# EAGLE board Teensy_Board (EAGLE 7.1.0)
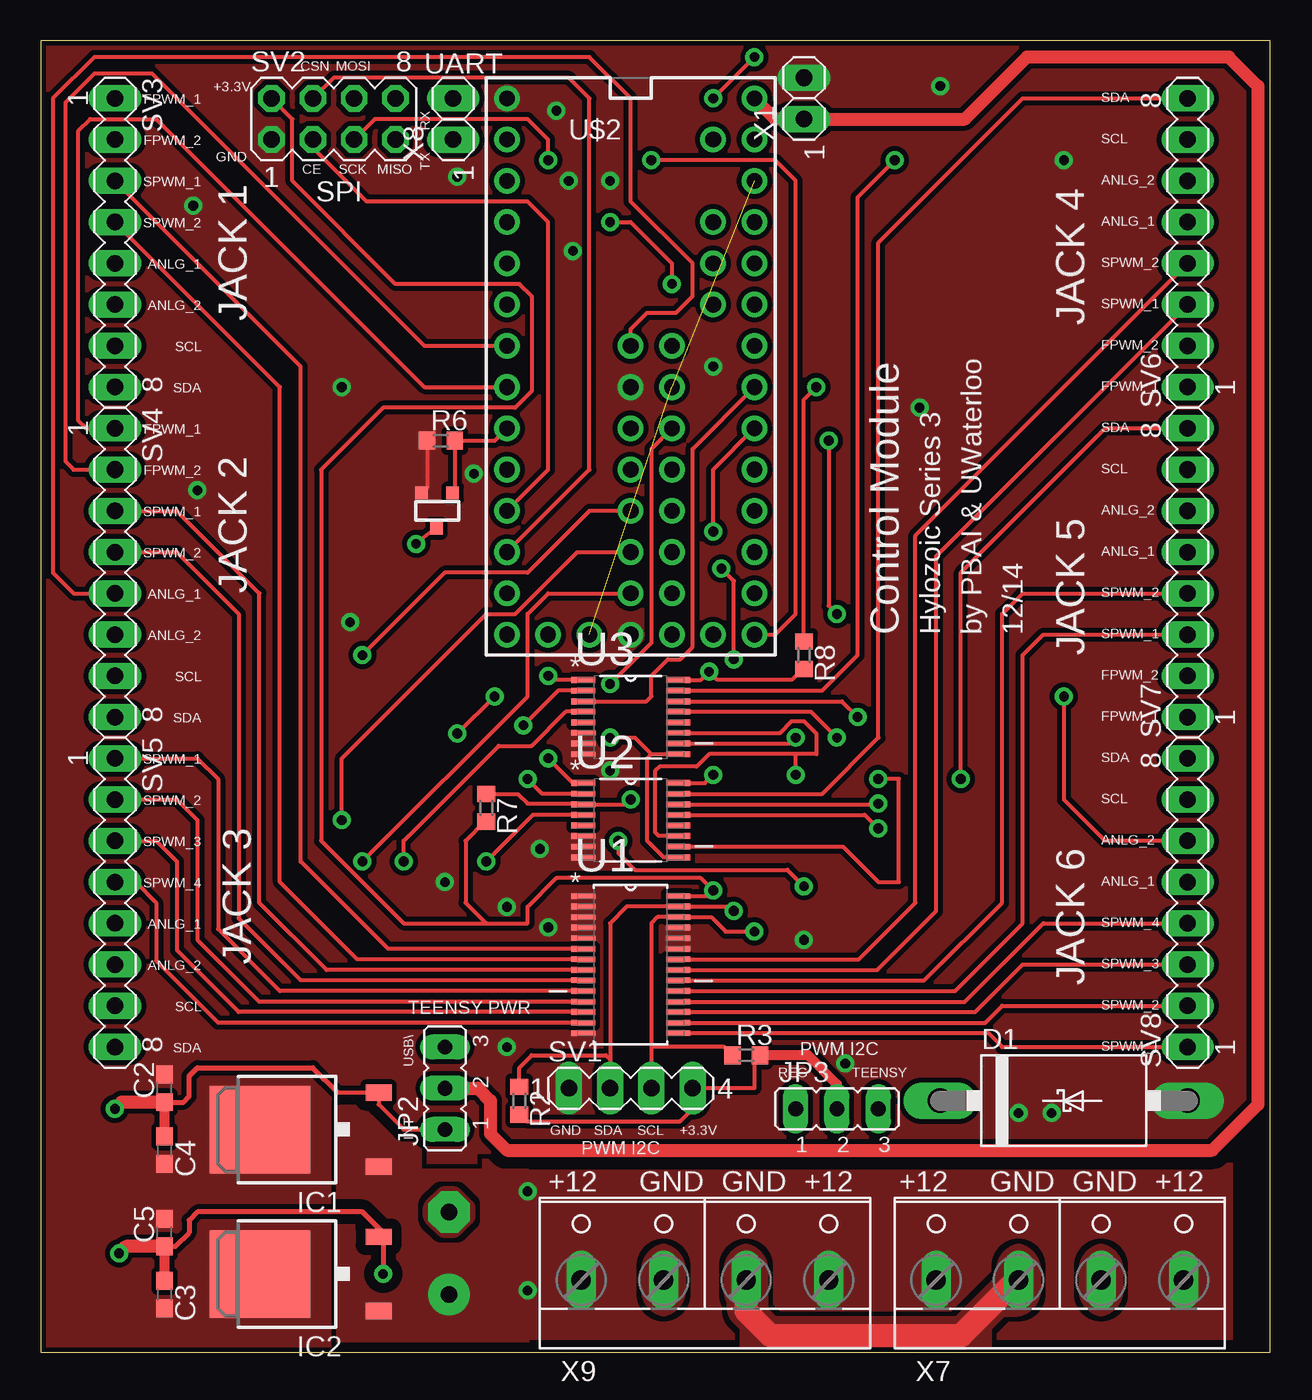
[diagram p0: board, top side]
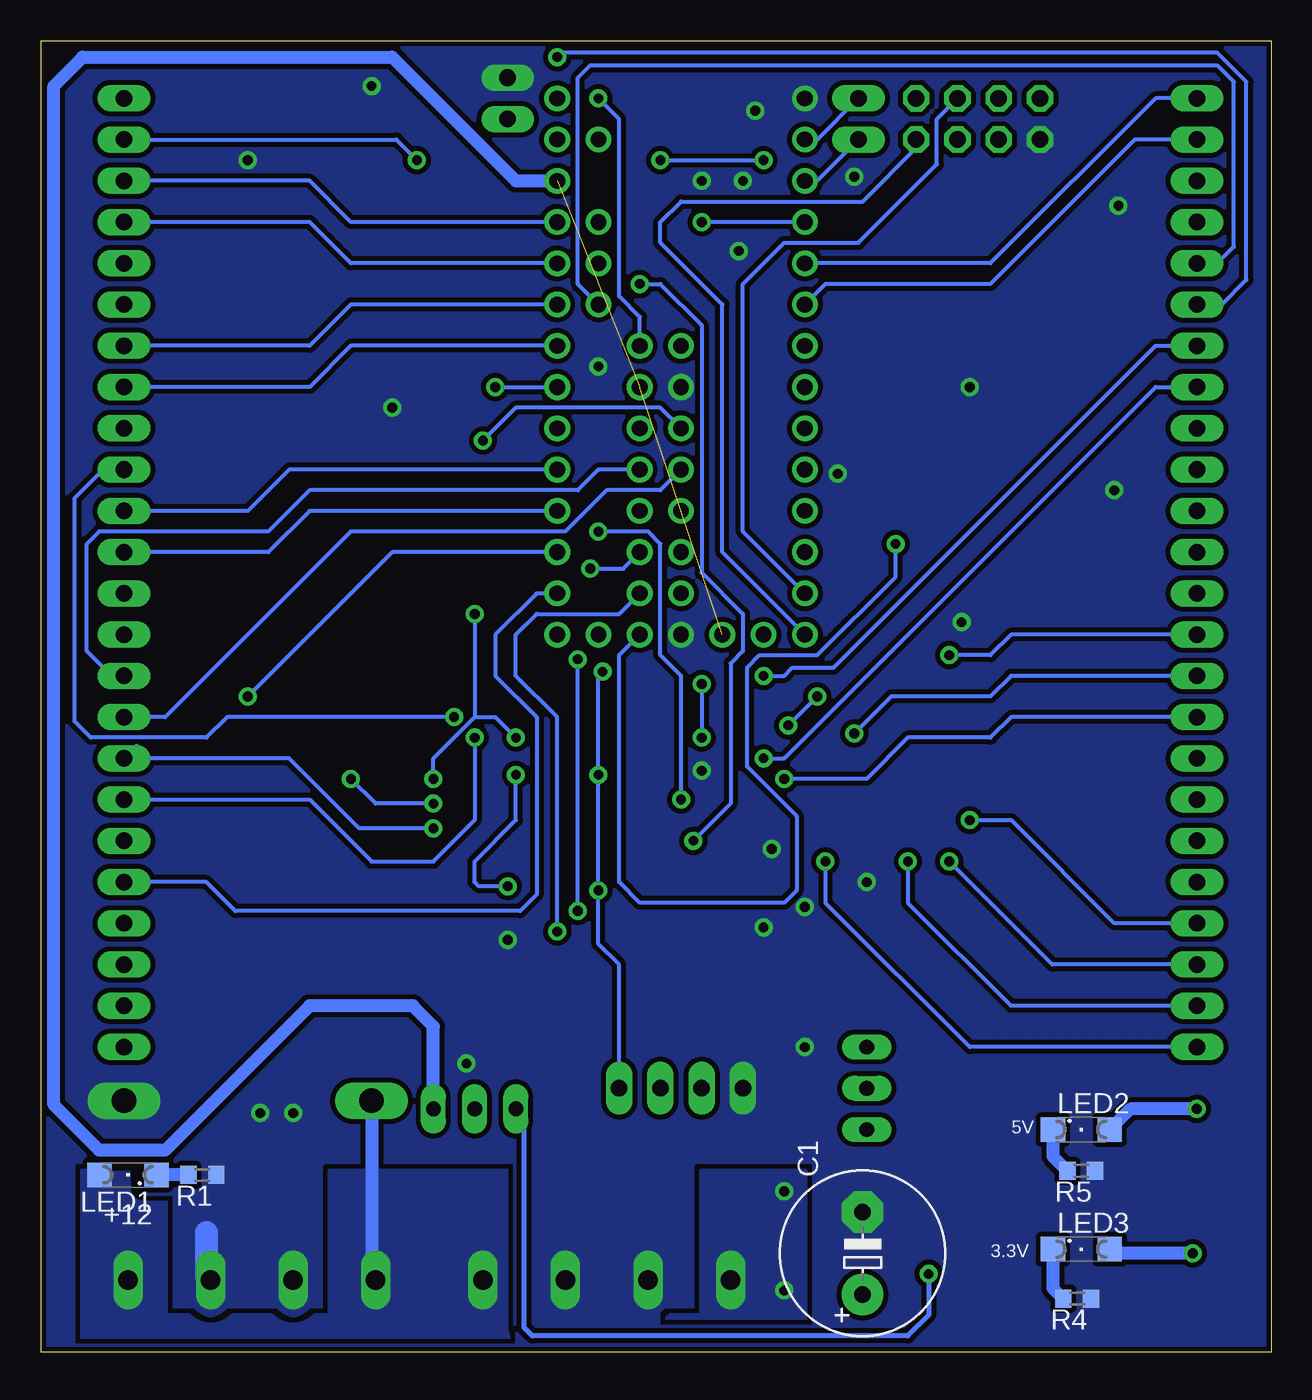
[diagram p1: board, bottom side, seen from below]

Size 75.69 x 80.77 mm. Coordinates in mm from the lower left corner, seen from the top.
Outline: 0,0 75.69,0 75.69,80.77 0,80.77 0,0
Copper layers (1*16): Top 0.035mm / dielectric 1.5mm / Bottom 0.035mm
Design rules "SparkFun": minimum track width 8mil, minimum drill 20mil, track to track 8mil, track to pad 8mil, pad to pad 8mil, via to via 8mil, smd to smd 8mil, copper to edge 10mil, drill to drill 8mil, minimum pad ring 12mil, minimum via ring 10mil, stop-mask expansion 4mil, vias tented up to drill 25mil, thermal gap 10mil

## Footprints (pad centres in the part's own frame; a part is rotated, then mirrored left to right if it is on the bottom)
E5-10,5 = drill 1.016 pad 2.54: + -2.54,0 | drill 1.016 pad 2.54 octagon: - 2.54,0
C0603 = smd 1.1 x 1: 1 -0.85,0; 2 0.85,0
DO201T15 = drill 1.499 long: A 7.62,0; C -7.62,0
DPACK_3 = smd 1 x 1.6: 1 -2.28,-4.8; 3 2.28,-4.8 | smd 5.4 x 6.2: 4 0,2.5
DPACK = smd 1 x 1.6: 1 -2.28,-4.8; 3 2.28,-4.8 | smd 5.4 x 6.2: 2 0,2.5
JP2 = drill 0.914 long: 1 -2.54,0; 2 0,0; 3 2.54,0
SML1206 = smd 1.5 x 1.5: A 1.75,0; C -1.75,0
SOT-23 = smd 0.762 x 0.762: 1 -0.979,-1.101; 2 0.94,-1.101; 3 0.025,1.067
R0603 = smd 1 x 1.1: 1 -0.85,0; 2 0.85,0
MA04-1 = drill 1.016 long: 1 -3.81,0; 2 -1.27,0; 3 1.27,0; 4 3.81,0
MA04-2 = drill 1.016 octagon: 1 -3.81,-1.27; 2 -3.81,1.27; 3 -1.27,-1.27; 4 -1.27,1.27; 5 1.27,-1.27; 6 1.27,1.27; 7 3.81,-1.27; 8 3.81,1.27
MA08-1 = drill 1.016 long: 1 -8.89,0; 2 -6.35,0; 3 -3.81,0; 4 -1.27,0; 5 1.27,0; 6 3.81,0; 7 6.35,0; 8 8.89,0
SOP65P640X110-28N = smd 1.473 x 0.356: 1 -2.921,4.216; 2 -2.921,3.581; 3 -2.921,2.921; 4 -2.921,2.286; 5 -2.921,1.626; 6 -2.921,0.965; 7 -2.921,0.33; 8 -2.921,-0.33; 9 -2.921,-0.965; 10 -2.921,-1.626; 11 -2.921,-2.286; 12 -2.921,-2.921; 13 -2.921,-3.581; 14 -2.921,-4.216; 15 2.921,-4.216; 16 2.921,-3.581; 17 2.921,-2.921; 18 2.921,-2.286; 19 2.921,-1.626; 20 2.921,-0.965; 21 2.921,-0.33; 22 2.921,0.33; 23 2.921,0.965; 24 2.921,1.626; 25 2.921,2.286; 26 2.921,2.921; 27 2.921,3.581; 28 2.921,4.216
SOP65P640X110-16N = smd 1.473 x 0.356: 1 -2.921,2.286; 2 -2.921,1.626; 3 -2.921,0.965; 4 -2.921,0.33; 5 -2.921,-0.33; 6 -2.921,-0.965; 7 -2.921,-1.626; 8 -2.921,-2.286; 9 2.921,-2.286; 10 2.921,-1.626; 11 2.921,-0.965; 12 2.921,-0.33; 13 2.921,0.33; 14 2.921,0.965; 15 2.921,1.626; 16 2.921,2.286
TEENSY_3.1_ALLPINS = drill 0.965: 0 -7.62,15.24; 1 -7.62,12.7; 2 -7.62,10.16; 3 -7.62,7.62; 3.3V 7.62,12.7; 3.3V1 -2.54,-15.24; 3.3V2 2.54,0; 4 -7.62,5.08; 5 -7.62,2.54; 6 -7.62,0; 7 -7.62,-2.54; 8 -7.62,-5.08; 9 -7.62,-7.62; 10 -7.62,-10.16; 11 -7.62,-12.7; 12 -7.62,-15.24; 13 7.62,-15.24; 14/A0 7.62,-12.7; 15/A1 7.62,-10.16; 16/A2 7.62,-7.62; 17/A3 7.62,-5.08; 18/A4 7.62,-2.54; 19/A5 7.62,0; 20/A6 7.62,2.54; 21/A7 7.62,5.08; 22/A8 7.62,7.62; 23/A9 7.62,10.16; 24 0,-2.54; 25 0,-5.08; 26 0,-7.62; 27 0,-10.16; 28 0,-12.7; 29 2.54,-12.7; 30 2.54,-10.16; 31 2.54,-7.62; 32 2.54,-5.08; 33 2.54,-2.54; A10 5.08,7.62; A11 5.08,5.08; A12 0,2.54; A13 2.54,2.54; A14 5.08,-15.24; AGND 7.62,15.24; AREF 5.08,10.16; GND -7.62,17.78; GND1 0,-15.24; GND2 0,0; PGM 2.54,-15.24; VBAT -5.08,-15.24; VIN 7.62,17.78; VUSB 5.08,15.24
1X02 = drill 1.016 long: 1 -1.27,0; 2 1.27,0
W237-4P = drill 1.194 long: 1 -7.62,-0.635; 2 -2.54,-0.635; 3 2.54,-0.635; 4 7.62,-0.635

## Placement (x,y rotation side)
C1  470uF  [E5-10,5]  25.15,6.1 90 bottom
C2  1uF  [C0603]  7.62,16.26 90 top
C3  1uF  [C0603]  7.62,3.56 270 top
C4  100nF  [C0603]  7.62,12.45 270 top
C5  100nF  [C0603]  7.62,7.37 90 top
D1  SB540E-G  [DO201T15]  62.99,15.49 0 top
IC1  MC7805BDTRKG  [DPACK_3]  16,13.72 90 top
IC2  UA78M33CKVU  [DPACK]  16,4.83 90 top
JP2  [JP2]  24.89,16.26 90 top
JP3  [JP2]  49.02,14.99 0 top
LED1  [SML1206]  70.36,10.92 180 bottom
LED2  [SML1206]  11.68,13.72 0 bottom
LED3  [SML1206]  11.68,6.35 0 bottom
Q1  PROGRAM_FET  [SOT-23]  24.38,51.82 180 top
R1  470  [R0603]  65.79,10.92 180 bottom
R2  4k7  [R0603]  29.46,15.49 270 top
R3  4k7  [R0603]  43.43,18.29 0 top
R4  470  [R0603]  11.94,3.3 180 bottom
R5  470  [R0603]  11.68,11.18 180 bottom
R6  4k7  [R0603]  24.64,56.13 0 top
R7  2.2k  [R0603]  27.43,33.53 270 top
R8  2.2k  [R0603]  46.99,42.93 270 top
SV1  PWM_I2C  [MA04-1]  36.32,16.26 0 top
SV2  SPI  [MA04-2]  18.03,75.95 0 top
SV3  [MA08-1]  4.57,68.33 270 top
SV4  [MA08-1]  4.57,48.01 270 top
SV5  [MA08-1]  4.57,27.69 270 top
SV6  [MA08-1]  70.61,68.33 90 top
SV7  [MA08-1]  70.61,48.01 90 top
SV8  [MA08-1]  70.61,27.69 90 top
U1  PCA9685PW  [SOP65P640X110-28N]  36.32,23.88 0 top
U2  74HC4051PW,118  [SOP65P640X110-16N]  36.32,32.77 0 top
U3  74HC4051PW,118  [SOP65P640X110-16N]  36.32,39.12 0 top
U$2  TEENSY_3.1_ALL_PINS_AND_PADS  [TEENSY_3.1_ALLPINS]  36.32,59.44 0 top
X1  [1X02]  46.99,77.22 90 top
X7  [W237-4P]  62.74,5.08 0 top
X8  UART  [1X02]  25.4,75.95 90 top
X9  [W237-4P]  40.89,5.08 0 top

## Library data of the parts
C1-C5 = rcl
D1 IC1 IC2 R1-R8 X1 X8 = CBLA_Test_bed_Library
JP2 JP3 = jumper
LED1-LED3 = led
Q1 = transistors
SV1-SV8 = con-lstb; OC_FARNELL: unknown; OC_NEWARK: unknown
U1 = NXP_By_element14_Batch_1; MPN: PCA9685PW; OC_FARNELL: 1854074; OC_NEWARK: 19T6398; PACKAGE: TSSOP-28; SUPPLIER: NXP
U2 U3 = NXP_By_element14_Batch_1; MPN: 74HC4051PW,118; OC_FARNELL: 1826843; OC_NEWARK: 78R6260; PACKAGE: TSSOP-16; SUPPLIER: NXP
U$2 = Teensy_3_Series_Board_v1.0
X7 X9 = con-wago-508; OC_FARNELL: unknown; OC_NEWARK: unknown

## Nets
3V3INT: JP3.2 R2.2 R3.2 R7.2 R8.2 SV1.4 SV2.2 U1.28 U2.16 U3.16
+3V3: C3.1 C5.1 IC2.3 JP3.1 LED3.A
+5V: C2.1 C4.1 IC1.3 JP2.1 LED2.A
+12V: C1.+ D1.C IC1.1 IC2.1 LED1.A X7.1 X7.4 X9.1 X9.4
A0: SV8.5 U$2.14/A0
A1: SV8.6 U$2.15/A1
A2: SV7.5 U$2.16/A2
A3: SV7.6 U$2.17/A3
A8: SV6.5 U$2.22/A8
A9: SV6.6 U$2.23/A9
A11: SV3.5 U$2.A11
A12: SV4.5 U$2.A12
A13: SV3.6 U$2.A13
A15: SV4.6 U$2.26
A16: SV5.5 U$2.27
A17: SV5.6 U$2.28
AGND: U$2.AGND
AREF: U$2.AREF
CE: SV2.3 U$2.9
CSN: SV2.4 U$2.10
FPWM_1_1: SV3.1 U$2.3
FPWM_1_2: SV3.2 U$2.4
FPWM_2_1: SV4.1 U$2.6
FPWM_2_2: SV4.2 U$2.5
FPWM_4_1: SV6.1 U$2.20/A6
FPWM_4_2: SV6.2 U$2.21/A7
FPWM_5_1: SV7.1 U$2.25
FPWM_5_2: SV7.2 U$2.32
GND: C1.- C2.2 C3.2 C4.2 C5.2 D1.A IC1.4 IC2.2 Q1.2 R1.1 R4.1 R5.1 R6.1 SV1.1 SV2.1 U1.1 U1.2 U1.3 U1.4 U1.5 U1.14 U1.23 U1.24 U1.25 U2.6 U2.7 U2.8 U3.6 U3.7 U3.8 U$2.GND U$2.GND1 U$2.GND2 X1.2 X7.2 X7.3 X9.2 X9.3
MISO: SV2.7 U$2.12
MOSI: SV2.6 U$2.11
MUL_ADR_0: U2.11 U3.11 U$2.2
MUL_ADR_1: U2.10 U3.10 U$2.24
MUL_ADR_2: U2.9 U3.9 U$2.33
MUL_SCL: R8.1 U3.3 U$2.19/A5
MUL_SCL_1: SV3.7 U3.1
MUL_SCL_2: SV4.7 U3.2
MUL_SCL_3: SV5.7 U3.4
MUL_SCL_4: SV6.7 U3.15
MUL_SCL_5: SV7.7 U3.14
MUL_SCL_6: SV8.7 U3.13
MUL_SDA: R7.1 U2.3 U$2.18/A4
MUL_SDA_1: SV3.8 U2.1
MUL_SDA_2: SV4.8 U2.2
MUL_SDA_3: SV5.8 U2.4
MUL_SDA_4: SV6.8 U2.15
MUL_SDA_5: SV7.8 U2.14
MUL_SDA_6: SV8.8 U2.13
N$10: LED1.C R1.2
N$18: LED3.C R4.2
N$19: LED2.C R5.2
PGM: Q1.3 U$2.PGM
PGM_DO: Q1.1 R6.2 U$2.7
RX1: U$2.0 X8.2
SCK: SV2.5 U$2.13
SCL_PWM: R3.1 SV1.3 U1.26 U$2.29
SDA_PWM: R2.1 SV1.2 U1.27 U$2.30
SPWM_1_1: SV3.3 U1.6
SPWM_1_2: SV3.4 U1.7
SPWM_2_1: SV4.3 U1.8
SPWM_2_2: SV4.4 U1.9
SPWM_3_1: SV5.1 U1.10
SPWM_3_2: SV5.2 U1.11
SPWM_3_3: SV5.3 U1.12
SPWM_3_4: SV5.4 U1.13
SPWM_4_1: SV6.3 U1.21
SPWM_4_2: SV6.4 U1.22
SPWM_5_1: SV7.3 U1.19
SPWM_5_2: SV7.4 U1.20
SPWM_6_1: SV8.1 U1.15
SPWM_6_2: SV8.2 U1.16
SPWM_6_3: SV8.3 U1.17
SPWM_6_4: SV8.4 U1.18
TEENSY_3V3: JP3.3 U$2.3.3V U$2.3.3V1 U$2.3.3V2
TEENSY_VIN: JP2.2 U$2.VIN X1.1
TX1: U$2.1 X8.1
VBAT: U$2.VBAT
VUSB: U$2.VUSB

## Tracks (layer width: path | path; a pad name or v marks a point on that pad's centre or on a via)
3V3INT  (via drill 0.6)
  Top 0.254: U2.16 40.89,35.05 v41.4,35.56 | U3.16 40.64,41.4 v41.15,41.91 41.66,41.4 46.23,41.4 46.9,42.08 R8.2 | 27.43,26.42 22.35,26.42 17.27,31.5 17.27,54.36 21.08,58.17 29.21,58.17 30.23,59.18 30.23,65.02 29.46,65.79 21.84,65.79 15.49,72.14 15.49,75.95 SV2.2 | 27.43,26.42 29.97,26.42 29.97,27.43 31.75,29.21 40.64,29.21 v41.4,28.45 41.05,28.09 U1.28 | R3.2 43.94,17.95 43.94,16.26 SV1.4 40.13,14.99 39.37,14.22 29.88,14.22 R2.2 | R7.2 27.34,32.68 26.16,31.5 26.16,27.69 27.43,26.42
  Top 0.61: JP3.2 49.02,16.51 47.24,18.29 R3.2
  Bottom 0.254: v41.15,41.91 41.4,41.66 v41.4,35.56 v41.4,28.45 41.4,25.15 40.13,23.88 SV1.4
+3V3  (via drill 0.6)
  Top 0.305: IC2.3 20.8,7.65 | 20.8,7.65 19.81,8.64 9.65,8.64 9.14,8.13 9.14,7.37 8.29,6.52 C5.1 | 20.8,7.65 21.08,7.37 v21.08,4.83
  Top 0.61: C5.1 C3.1
  Top 0.813: C5.1 5.25,6.52 v4.83,6.1
  Bottom 0.305: JP3.1 45.97,14.48 45.97,1.52 45.47,1.02 22.35,1.02 21.08,2.29 v21.08,4.83
  Bottom 0.813: v4.83,6.1 9.68,6.1 LED3.A
+5V  (via drill 0.6)
  Top 0.254: 18.29,16 IC1.3 20.8,15.27 22.35,13.72 JP2.1
  Top 0.305: C2.1 8.8,15.41 9.14,15.75 9.14,17.02 9.65,17.53 16.76,17.53 18.29,16
  Top 0.61: C2.1 C4.1
  Top 0.813: C2.1 4.99,15.41 v4.57,14.99
  Bottom 0.813: v4.57,14.99 8.66,14.99 LED2.A
+12V  (via drill 0.6)
  Bottom 0.813: D1.C 55.37,4.7 X7.1
  other vias: 29.97,3.81 29.97,9.91
  pour Top (isolate 0.762, no thermals, hatched): 73.15,12.45 73.15,-0.25 27.43,-0.25 27.43,12.45
  pour Bottom (isolate 0.813, no thermals): 28.7,11.18 28.7,-0.25 73.15,-0.25 73.15,11.18 68.07,11.18 68.07,2.29 57.91,2.29 57.91,11.18 46.48,11.18 46.48,2.29 35.05,2.29 35.05,11.18
  pour Top (isolate 0.61, rank 2, no thermals, hatched): 23.37,20.07 18.29,20.07 18.29,0.51 29.97,0.51 29.97,11.18 23.37,11.18
A0
  Bottom 0.254: U$2.14/A0 45.21,46.74 47.75,44.2 47.75,41.66 45.21,39.12 45.21,28.19 46.23,27.18 63.75,27.18 65.53,28.96 SV8.5
A1  (via drill 0.6)
  Top 0.254: v62.99,40.39 62.99,34.04 65.53,31.5 SV8.6
  Bottom 0.254: U$2.15/A1 54.1,49.28 v62.99,40.39
A2
  Bottom 0.254: U$2.16/A2 59.18,51.82 61.72,49.28 SV7.5
A3
  Bottom 0.254: U$2.17/A3 60.45,54.36 62.99,51.82 SV7.6
A8
  Bottom 0.254: U$2.22/A8 56.64,67.06 59.18,69.6 SV6.5
A9
  Bottom 0.254: U$2.23/A9 56.64,69.6 59.18,72.14 SV6.6
A11
  Bottom 0.254: U$2.A11 42.67,65.79 42.67,78.49 41.91,79.25 3.3,79.25 2.29,78.23 2.29,68.07 3.3,67.06 SV3.5
A12
  Top 0.254: U$2.A12 36.32,62.99 37.34,64.01 39.12,64.01 40.13,65.02 40.13,67.06 36.32,70.87 36.32,77.22 33.78,79.76 3.3,79.76 0.76,77.22 0.76,48.01 2.03,46.74 SV4.5
A13  (via drill 0.6)
  Top 0.254: v41.4,77.22 v43.94,79.76
  Bottom 0.254: U$2.A13 38.86,63.75 40.13,65.02 40.13,75.95 v41.4,77.22 | SV3.6 3.05,64.52 1.52,66.04 1.52,78.23 3.3,80.01 43.69,80.01 v43.94,79.76
A15  (via drill 0.6)
  Top 0.254: U$2.26 33.78,51.82 29.97,48.01 24.89,48.01 v19.81,42.93
  Bottom 0.254: SV4.6 16,44.2 17.27,42.93 v19.81,42.93
A16  (via drill 0.6)
  Top 0.254: v18.54,32.77 18.54,36.58 27.43,45.47 29.21,45.47 33.02,49.28 U$2.27
  Bottom 0.254: v18.54,32.77 16,32.77 9.65,26.42 SV5.5
A17  (via drill 0.6)
  Top 0.254: v19.81,30.23 29.97,40.39 29.97,45.47 31.24,46.74 U$2.28
  Bottom 0.254: v19.81,30.23 13.46,23.88 SV5.6
CE
  Top 0.254: U$2.9 31.24,54.36 31.24,69.6 29.97,70.87 20.07,70.87 16.76,74.17 SV2.3
CSN
  Top 0.254: U$2.10 33.78,54.36 33.78,77.22 32.51,78.49 18.03,78.49 SV2.4
FPWM_1_1
  Bottom 0.254: SV3.1 7.11,77.22 17.27,67.06 U$2.3
FPWM_1_2
  Bottom 0.254: SV3.2 8.38,74.68 17.27,65.79 27.43,65.79 U$2.4
FPWM_2_1
  Top 0.254: U$2.6 23.62,59.44 7.11,75.95 3.05,75.95 2.29,75.18 2.29,57.4 2.79,56.9 SV4.1
FPWM_2_2
  Top 0.254: U$2.5 23.62,61.98 6.86,78.74 3.3,78.74 1.52,76.96 1.52,54.86 2.03,54.36 SV4.2 3.3,54.36
FPWM_4_1
  Bottom 0.254: U$2.20/A6 56.64,61.98 59.18,59.44 SV6.1
FPWM_4_2
  Bottom 0.254: U$2.21/A7 56.64,64.52 59.18,61.98 SV6.2
FPWM_5_1
  Bottom 0.254: U$2.25 37.59,53.09 40.89,53.09 43.43,50.55 56.64,50.55 68.07,39.12 SV7.1
FPWM_5_2
  Bottom 0.254: U$2.32 41.4,54.36 42.67,53.09 59.18,53.09 61.72,50.55 72.14,50.55 72.9,49.78 72.9,43.18 71.37,41.66 SV7.2
GND  (via drill 0.6)
  Top 0.254: R6.1 23.79,53.26 Q1.2
  Top 1.422: 60.33,4.45 60.2,4.32 59.94,4.32 56.64,1.02 44.96,1.02 43.43,2.54 X9.3
  Bottom 1.422: 65.53,7.37 65.53,4.7 X7.3
  other vias: 30.73,30.99 19.05,44.96 31.75,76.45 41.4,60.71 9.4,70.61 18.54,59.44 46.99,25.4 24.89,28.96 54.1,58.17 60.2,14.73 28.7,18.8 62.99,73.41 9.65,53.09 35.05,35.81 25.65,72.39 32.77,67.82 26.67,54.1 35.05,72.14 32.51,72.14 28.7,27.43 31.24,26.16 62.23,14.73 49.53,17.78 55.37,77.98
  pour Top (isolate 0.305, rank 3, no thermals, hatched): 0,0 75.69,0 75.69,81.03 0,81.03
  pour Bottom (isolate 0.305, rank 3, no thermals, hatched): 0,0 0,81.03 75.69,81.03 75.69,0
  pour Bottom (isolate 0.813, rank 2, no thermals): 22.35,12.45 22.35,-0.25 74.42,-0.25 74.42,12.45
MISO
  Bottom 0.254: U$2.12 33.78,49.28 33.78,64.52 37.59,68.33 37.59,69.6 36.32,70.87 25.15,70.87 21.84,74.17 SV2.7
MOSI
  Bottom 0.254: U$2.11 32.51,50.55 32.51,65.79 29.97,68.33 25.4,68.33 20.57,73.15 20.57,75.95 SV2.6
MUL_ADR_0  (via drill 0.6)
  Top 0.254: U3.11 45.52,38.15 46.23,38.86 46.99,38.86 47.75,38.1 47.75,36.83 46.48,36.83 | 46.48,36.83 41.15,36.83 40.39,36.07 38.1,36.07 37.85,35.81 37.85,32 38.05,31.8 U2.11 | v35.05,69.6 36.32,69.6 38.86,67.06 v38.86,65.79 | v46.48,35.56 46.48,36.83 | v35.56,31.5 35.56,30.73 36.58,29.72 45.97,29.72 v46.99,28.7
  Bottom 0.254: U$2.2 v35.05,69.6 | v38.86,65.79 37.59,65.79 35.05,63.25 35.05,48.01 32.51,45.47 32.51,43.18 33.27,42.42 33.27,33.78 v35.56,31.5 | v46.99,28.7 48.77,28.7 49.02,28.96 49.02,30.23 46.48,32.77 v46.48,35.56
MUL_ADR_1  (via drill 0.6)
  Top 0.254: U2.10 49.38,31.14 51.56,28.96 52.83,28.96 52.83,35.31 v51.56,35.31 | U3.10 46.13,37.49 v46.48,37.85 | v48.51,56.13 48.51,45.97 v49.02,45.47
  Bottom 0.254: v51.56,35.31 51.56,36.58 49.02,39.12 | 49.02,39.12 47.75,39.12 v46.48,37.85 | U$2.24 37.59,58.17 46.48,58.17 v48.51,56.13 | v49.02,45.47 49.02,39.12
MUL_ADR_2  (via drill 0.6)
  Top 0.254: U2.9 38.35,30.48 37.34,31.5 37.34,36.58 37.59,36.83 | 37.59,36.83 U3.9 | U$2.33 37.59,55.63 37.59,43.69 v35.05,41.15 | v35.05,37.85 36.58,37.85 37.59,36.83
  Bottom 0.254: v35.05,41.15 v35.05,37.85
MUL_SCL  (via drill 0.6)
  Top 0.254: U3.3 37.29,40.08 37.59,40.39 37.59,41.66 38.61,42.67 39.37,42.67 40.13,43.43 40.13,55.63 U$2.19/A5 | R8.1 46.99,58.67 v47.75,59.44
  Bottom 0.254: v47.75,59.44 U$2.19/A5
MUL_SCL_1  (via drill 0.6)
  Top 0.254: U3.1 31.5,41.4 v31.24,41.66
  Bottom 0.254: SV3.7 7.11,61.98 26.92,42.16 29.46,42.16 29.97,41.66 v31.24,41.66
MUL_SCL_2  (via drill 0.6)
  Top 0.254: v27.94,40.39 v25.65,38.1 | U3.2 31.85,40.74 v29.72,38.61
  Bottom 0.254: v29.72,38.61 v27.94,40.39 | SV4.7 16,41.66 17.27,40.39 23.37,40.39 v25.65,38.1
MUL_SCL_3  (via drill 0.6)
  Top 0.254: U3.4 32.33,39.45 30.23,37.34 28.19,37.34 22.35,31.5 v22.35,30.23
  Bottom 0.254: v22.35,30.23 22.35,27.69 16,21.34 SV5.7
MUL_SCL_4  (via drill 0.6)
  Top 0.254: U3.15 48.11,40.74 50.29,42.93 50.29,71.12 v52.58,73.41
  Bottom 0.254: SV6.7 53.85,74.68 v52.58,73.41
MUL_SCL_5  (via drill 0.6)
  Top 0.254: U3.14 49.33,40.08 v50.29,39.12
  Bottom 0.254: v50.29,39.12 64.26,39.12 65.53,37.85 72.64,37.85 73.66,38.86 73.66,52.58 71.88,54.36 SV7.7
MUL_SCL_6  (via drill 0.6)
  Top 0.254: U3.13 47.42,39.45 v49.02,37.85
  Bottom 0.254: v49.02,37.85 49.02,32.77 51.56,30.23 55.37,30.23 59.18,34.04 SV8.7
MUL_SDA  (via drill 0.6)
  Top 0.254: v36.32,34.04 36.02,33.73 U2.3 33.35,33.78 29.97,33.78 29.38,34.38 R7.1 | v41.4,50.55 41.4,54.36 U$2.18/A4
  Bottom 0.254: v36.32,34.04 36.32,41.66 37.59,42.93 37.59,49.78 38.35,50.55 v41.4,50.55
MUL_SDA_1  (via drill 0.6)
  Top 0.254: U2.1 32.77,35.05 v31.24,36.58
  Bottom 0.254: v31.24,36.58 29.97,36.58 7.11,59.44 SV3.8
MUL_SDA_2  (via drill 0.6)
  Top 0.254: U2.2 30.89,34.39 v29.97,35.31
  Bottom 0.254: SV4.8 16,39.12 17.27,37.85 22.35,37.85 24.89,35.31 v29.97,35.31
MUL_SDA_3  (via drill 0.6)
  Top 0.254: U2.4 30.3,33.1 v27.43,30.23
  Bottom 0.254: v27.43,30.23 27.43,27.69 18.54,18.8 SV5.8
MUL_SDA_4
  Top 0.254: U2.15 48.11,34.39 51.56,37.85 51.56,68.33 60.45,77.22 SV6.8
MUL_SDA_5  (via drill 0.6)
  Top 0.254: 69.34,56.9 SV7.8 65.53,56.9 56.64,48.01 v56.64,35.31 | U2.14 51.51,33.73 v51.56,33.78
  Bottom 0.254: v51.56,33.78 55.12,33.78 v56.64,35.31
MUL_SDA_6  (via drill 0.6)
  Top 0.254: U2.13 50.72,33.1 v51.56,32.26
  Bottom 0.254: 69.85,37.34 SV8.8 60.45,36.58 56.13,32.26 v51.56,32.26
N$10
  Bottom 0.813: R1.2 LED1.C
N$18
  Bottom 0.813: LED3.C 13.43,3.95 R4.2
N$19
  Bottom 0.813: LED2.C 13.43,12.08 R5.2
PGM  (via drill 0.6)
  Top 0.254: Q1.3 23.09,49.81 v23.11,49.78
  Bottom 0.254: v23.11,49.78 23.11,47.75 27.94,42.93 31.5,42.93 32.26,42.16 32.26,36.07 29.21,33.02 29.21,28.45 29.97,27.69 38.86,27.69 40.13,28.96 40.13,42.93 U$2.PGM
PGM_DO
  Top 0.254: Q1.1 25.49,53.04 R6.2 27.94,56.13 U$2.7
RX1
  Bottom 0.254: U$2.0 27.94,74.68 X8.2
SCK  (via drill 0.6)
  Top 0.254: U$2.13 45.21,44.2 46.48,45.47 46.48,72.14 45.21,73.41 v37.59,73.41 | v31.24,73.41 31.24,74.68 29.97,75.95 20.57,75.95 SV2.5
  Bottom 0.254: v37.59,73.41 v31.24,73.41
SCL_PWM  (via drill 0.6)
  Top 0.254: 37.59,18.8 37.59,26.42 37.97,26.8 U1.26 41.27,26.8 42.16,25.91 v43.94,25.91 | 37.59,18.8 SV1.3 | R3.1 42.08,18.8 37.59,18.8
  Bottom 0.254: v43.94,25.91 43.94,39.12 46.48,41.66 46.48,44.2 45.21,45.47 40.13,45.47 U$2.29
SDA_PWM  (via drill 0.6)
  Top 0.254: v42.67,42.67 42.67,47.5 v41.91,48.26 | 35.05,18.03 35.05,26.42 36.09,27.46 U1.27 42.39,27.46 v42.67,27.18 | 35.05,18.03 SV1.2 | R2.1 29.46,17.53 30.23,18.29 34.8,18.29 35.05,18.03
  Bottom 0.254: v42.67,27.18 v42.67,42.67 | v41.91,48.26 39.88,48.26 U$2.30
SPWM_1_1
  Top 0.254: U1.6 21.39,24.84 16,30.23 16,60.71 SV3.3
SPWM_1_2
  Top 0.254: U1.7 19.48,24.21 14.73,28.96 14.73,59.44 SV3.4
SPWM_2_1
  Top 0.254: U1.8 17.6,23.55 13.46,27.69 13.46,46.74 8.38,51.82 SV4.3
SPWM_2_2
  Top 0.254: U1.9 16,22.91 12.19,26.72 12.19,45.47 8.38,49.28 SV4.4
SPWM_3_1
  Top 0.254: U1.10 14.73,22.25 10.92,26.06 10.92,35.31 9.65,36.58 SV5.1
SPWM_3_2
  Top 0.254: U1.11 13.46,21.59 9.65,25.4 9.65,32.77 8.38,34.04 SV5.2
SPWM_3_3
  Top 0.254: U1.12 12.19,20.95 8.38,24.77 8.38,30.23 7.11,31.5 SV5.3
SPWM_3_4
  Top 0.254: U1.13 10.92,20.3 7.11,24.11 7.11,27.69 5.84,28.96 SV5.4
SPWM_4_1
  Top 0.254: U1.21 51.49,23.55 55.12,27.18 55.12,49.02 SV6.3
SPWM_4_2
  Top 0.254: U1.22 50.37,24.21 53.85,27.69 53.85,50.29 SV6.4
SPWM_5_1
  Top 0.254: U1.19 56.29,22.25 60.45,26.42 60.45,42.93 61.72,44.2 SV7.3
SPWM_5_2
  Top 0.254: U1.20 54.41,22.91 59.18,27.69 59.18,45.47 60.45,46.74 SV7.4
SPWM_6_1
  Top 0.254: U1.15 58.32,19.66 59.18,18.8 SV8.1
SPWM_6_2
  Top 0.254: U1.16 58.14,20.3 59.18,21.34 SV8.2
SPWM_6_3
  Top 0.254: U1.17 57.53,20.95 60.45,23.88 SV8.3
SPWM_6_4
  Top 0.254: U1.18 56.9,21.59 61.72,26.42 SV8.4
TEENSY_3V3  (2 unrouted)
  Bottom 0.813: JP3.3 51.56,20.07 52.83,21.34 59.18,21.34 68.07,12.45 72.14,12.45 74.93,15.24 74.93,77.98 73.15,79.76 54.1,79.76 46.48,72.14 U$2.3.3V
TEENSY_VIN
  Top 0.813: JP2.2 26.92,16.26 27.69,15.49 27.69,13.46 28.7,12.45 72.14,12.45 74.93,15.24 74.93,77.98 73.15,79.76 60.71,79.76 56.9,75.95 X1.1 45.21,75.95 U$2.VIN
TX1
  Bottom 0.254: U$2.1 27.94,72.14 X8.1

## Text on the board
tPlace: CSN | MOSI | UART | +3.3V | FPWM_1 | SDA | RX | FPWM_2 | GND | TX | SCL | CE | SCK | MISO | SPWM_1 | SPI | ANLG_2 | SPWM_2 | ANLG_1 | ANLG_1 | SPWM_2 | ANLG_2 | JACK 1 | SPWM_1 | JACK 4 | SCL | FPWM_2 | SDA | FPWM_1 | FPWM_1 | SDA | FPWM_2 | SCL | SPWM_1 | ANLG_2 | SPWM_2 | ANLG_1 | ANLG_1 | JACK 2 | SPWM_2 | ANLG_2 | Control Module | Hylozoic Series 3 | by PBAI & UWaterloo | 12/14 | SPWM_1 | JACK 5 | SCL | FPWM_2 | SDA | FPWM_1 | SPWM_1 | SDA | SPWM_2 | SCL | SPWM_3 | ANLG_2 | SPWM_4 | ANLG_1 | ANLG_1 | SPWM_4 | ANLG_2 | JACK 3 | SPWM_3 | JACK 6 | SCL | TEENSY PWR | SPWM_2 | USB\ | SDA | SPWM_1 | PWM I2C | REG | TEENSY | INT | GND | SDA | SCL | +3.3V | PWM I2C | +12 | GND | GND | +12 | +12 | GND | GND | +12
bPlace: 5V | +12 | 3.3V